# EAGLE board main-old (EAGLE 6.2)
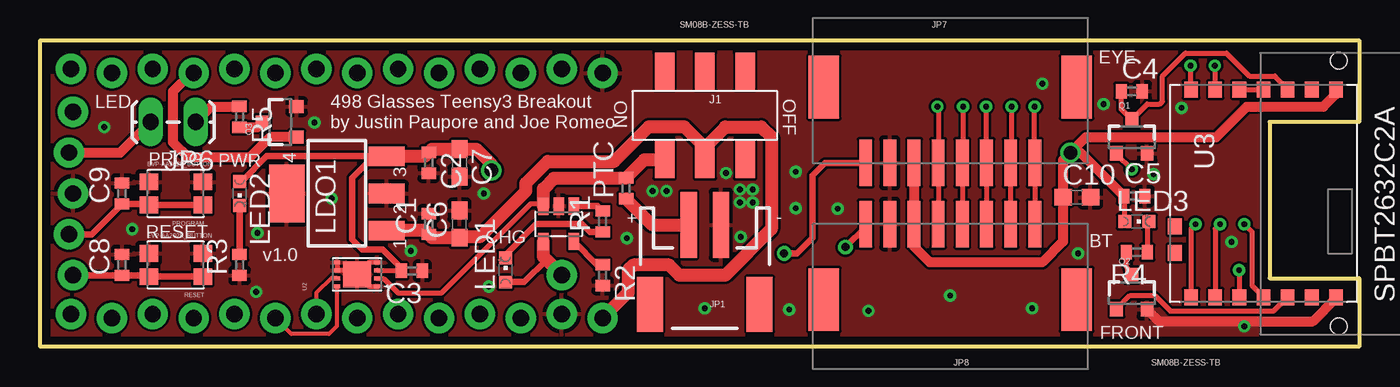
[diagram p0: board, top side]
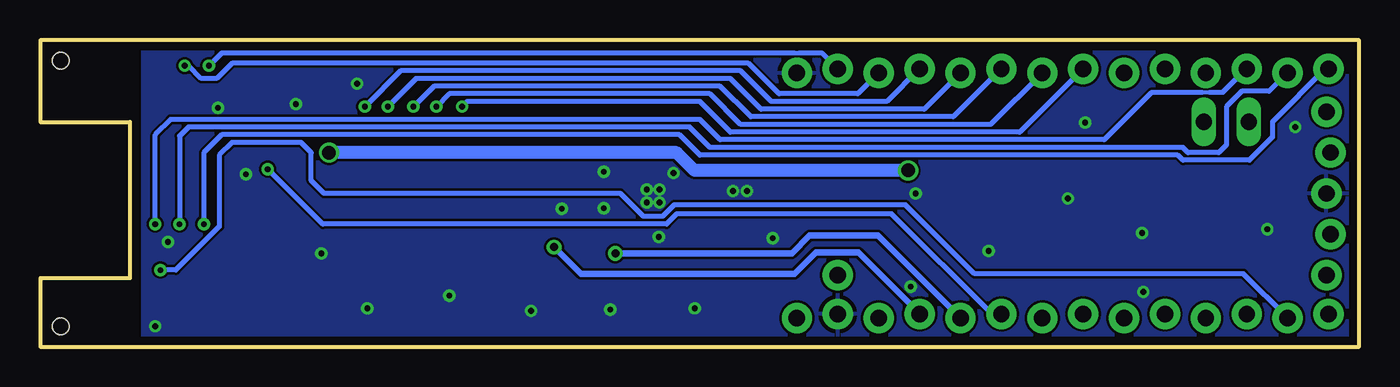
[diagram p1: board, bottom side, seen from below]

Size 81.92 x 19.05 mm. Coordinates in mm from the lower left corner, seen from the top.
Outline: 0,0 0,19.05 81.92,19.05 81.92,13.97 76.36,13.97 76.36,4.25 81.92,4.25 81.92,0 0,0
Copper layers (1*16): Top 0.0178mm / dielectric 59mil / Bottom 0.0178mm
Design rules: minimum track width 6mil, minimum drill 14mil, track to track 6mil, track to pad 6mil, pad to pad 6mil, via to via 6mil, smd to smd 6mil, copper to edge 20mil, drill to drill 16mil, minimum pad ring 8mil, minimum via ring 8mil, stop-mask expansion 3mil, vias tented up to drill 0mil, thermal gap 10mil
Holes 1 mm at 80.64,1.27 80.64,17.78

## Footprints (pad centres in the part's own frame; a part is rotated, then mirrored left to right if it is on the bottom)
C0402 = smd 0.7 x 0.9: 1 -0.65,0; 2 0.65,0
C0603 = smd 1.1 x 1: 1 -0.85,0; 2 0.85,0
JS2020_6PIN_SMT = smd 1.2 x 2.3: P1 -2.5,1.25; P2 -2.5,-4.25; P3 0,1.25; P4 0,-4.25; P5 2.5,1.25; P6 2.5,-4.25
JST-2-SMD = smd 1 x 4.1: 1 -1,-3.45; 2 1,-3.45 | smd 1.6 x 3.4: NC1 -3.4,1.5; NC2 3.4,1.5
1X14_LOCK = drill 1.016 pad 1.88: 1 0,0.127; 2 2.54,-0.127; 3 5.08,0.127; 4 7.62,-0.127; 5 10.16,0.127; 6 12.7,-0.127; 7 15.24,0.127; 8 17.78,-0.127; 9 20.32,0.127; 10 22.86,-0.127; 11 25.4,0.127; 12 27.94,-0.127; 13 30.48,0.127; 14 33.02,-0.127
1X05_LOCK = drill 1.016 pad 1.88: 1 0,0.127; 2 2.54,-0.127; 3 5.08,0.127; 4 7.62,-0.127; 5 10.16,0.127
1X01 = drill 1.016 pad 1.88: 1 0,0
1X02_LOCK_LONGPADS = drill 1.016 long: 1 -0.127,0; 2 2.667,0
SM08B_8PIN_SMD = smd 1.9 x 3.9: MOUNT1 -7.85,-4.7; MOUNT2 7.85,-4.7 | smd 0.8 x 2.9: P1 -5.25,0; P2 -3.75,0; P3 -2.25,0; P4 -0.75,0; P5 0.75,0; P6 2.25,0; P7 3.75,0; P8 5.25,0
SOT223 = smd 1.219 x 2.235: 1 -2.311,-3.099; 2 0,-3.099; 3 2.311,-3.099 | smd 3.6 x 2.2: 4 0,3.099
CHIPLED_0603 = smd 0.8 x 0.8: A 0,-0.75; C 0,0.75
EVP-AA202K_4PIN = smd 1.15 x 1.05: A -1.675,0.725; A' 1.675,0.725; B -1.675,-0.725; B' 1.675,-0.725
R0402 = smd 0.7 x 0.9: 1 -0.65,0; 2 0.65,0
SOT23-3 = smd 0.8 x 0.9: 1 -0.95,-1; 2 0.95,-1; 3 0,1.1
SOT23-5 = smd 1.06 x 0.65: P1 -0.35,0.95; P2 -0.35,0; P3 -0.35,-0.95; P4 1.85,-0.95; P5 1.85,0.95
TDFN_8PIN = smd 1.63 x 1.75: EP 1,0 | smd 0.25 x 0.4: P1 0.25,-1.25; P2 0.75,-1.25; P3 1.25,-1.25; P4 1.75,-1.25; P5 1.75,1.25; P6 1.25,1.25; P7 0.75,1.25; P8 0.25,1.25
SPBT2632C2A_16PIN_SMD = smd 1 x 0.85: P1 -6.45,-1.3; P2 -6.45,-2.8; P3 -6.45,-4.3; P4 -6.45,-5.8; P5 -6.45,-7.3; P6 -6.45,-8.8; P7 -6.45,-10.3; P8 6.45,-10.3; P9 6.45,-8.8; P10 6.45,-7.3; P11 6.45,-5.8; P12 6.45,-4.3; P13 6.45,-2.8; P14 6.45,-1.3; P15 -2.05,-0.3; P16 -3.7,-0.3

## Placement (x,y rotation side)
C1  1uF  [C0402]  24.13,7.62 90 top
C2  1uF  [C0402]  24.13,11.43 270 top
C3  1uF  [C0402]  23.08,4.71 180 top
C4  0.1uF  [C0402]  67.79,15.88 0 top
C5  1uF  [C0402]  67.94,9.37 0 top
C6  10uF  [C0603]  26.04,7.62 90 top
C7  10uF  [C0603]  26.04,11.43 270 top
C8  0.1uF  [C0402]  5.08,5.08 90 top
C9  0.1uF  [C0402]  5.08,9.53 90 top
C10  10uF  [C0603]  64.37,9.29 0 top
J1  JS202011SCQN  [JS2020_6PIN_SMT]  41.27,15.88 0 top
JP1  [JST-2-SMD]  41.27,4.13 180 top
JP2  M14LOCK  [1X14_LOCK]  1.91,17.14 0 top
JP3  M14LOCK  [1X14_LOCK]  1.91,1.91 0 top
JP4  [1X05_LOCK]  1.91,14.61 270 top
JP5  M01PTH  [1X01]  32.38,4.45 0 top
JP6  LED  [1X02_LOCK_LONGPADS]  9.53,13.97 180 top
JP7  SM08B-ZESS-TB  [SM08B_8PIN_SMD]  56.52,11.43 180 top
JP8  SM08B-ZESS-TB  [SM08B_8PIN_SMD]  56.52,7.62 0 top
LDO1  TC1262  [SOT223]  18.41,9.53 90 top
LED1  RED  [CHIPLED_0603]  28.89,4.76 0 top
LED2  GREEN  [CHIPLED_0603]  12.38,9.53 180 top
LED3  BLUE  [CHIPLED_0603]  68.1,7.78 270 top
PROGRAM  EVP-AA202K_BUTTON  [EVP-AA202K_4PIN]  8.41,9.53 180 top
PTC  500mA  [R0402]  36.39,9.84 90 top
Q1  2N7002  [SOT23-3]  67.79,13.02 0 top
Q2  2N7002  [SOT23-3]  67.79,3.33 0 top
Q3  2N7002  [SOT23-3]  14.92,13.97 90 top
R1  150  [R0402]  34.92,7.78 90 top
R2  4.7K  [R0402]  34.92,4.45 270 top
R3  56  [R0402]  12.38,5.08 90 top
R4  56  [R0402]  68.1,5.87 180 top
R5  DNI  [R0402]  12.38,14.29 270 top
RESET  EVP-AA202K_BUTTON  [EVP-AA202K_4PIN]  8.41,5.08 180 top
U1  MCP73831-SOT5  [SOT23-5]  32.19,8.38 270 top
U2  MAX17040-TDFN  [TDFN_8PIN]  19.68,3.49 90 top
U3  SPBT2632C2A  [SPBT2632C2A_16PIN_SMD]  70.17,9.53 90 top

## Library data of the parts
C1-C10 PTC R1-R5 = resistor
J1 JP7 JP8 LDO1 PROGRAM RESET U1-U3 = glasses
JP1-JP6 Q1-Q3 = SparkFun
LED1-LED3 = led

## Nets
+3V3: JP4.2 JP6.2
BT_RESET: JP3.9 Q1.1
GND: C1.2 C2.2 C3.1 C4.2 C5.2 C6.2 C7.2 C8.2 C9.2 C10.2 JP1.1 JP2.14 JP3.13 JP4.3 JP7.P7 JP8.P2 LDO1.2 LDO1.4 PROGRAM.B PROGRAM.B' Q1.2 Q2.2 Q3.2 R2.2 R3.1 RESET.B RESET.B' U1.P2 U2.EP U2.P1 U2.P4 U2.P5 U2.P6 U3.P7
I2C_SCL: JP3.7 U2.P7
I2C_SDA: JP3.6 U2.P8
INCP: JP2.10 JP7.P2 JP8.P7
INCV: JP2.8 JP7.P4 JP8.P5
INPHI: JP2.7 JP7.P5 JP8.P4
IR_LED: JP2.4 Q3.1
N$1: LED1.C R1.1
N$2: R1.2 U1.P1
N$3: R2.1 U1.P5
N$4: JP1.2 PTC.1
N$5: LED2.C R3.2
N$6: U3.P11 U3.P12
N$7: C4.1 Q1.3 U3.P10
N$8: Q2.1 U3.P5
N$9: LED3.C R4.1
N$10: Q2.3 R4.2
N$11: JP6.1 R5.1
N$12: Q3.3 R5.2
PIXEL_EYE: JP3.10 JP7.P8
PIXEL_FRONT: JP3.11 JP8.P1
RESP: JP2.11 JP7.P1 JP8.P8
RESV: JP2.9 JP7.P3 JP8.P6
SPI_CS: JP2.3 U3.P4
SPI_MISO: JP2.1 U3.P1
SPI_MOSI: JP2.2 U3.P2
SPI_SCK: JP3.2 U3.P3
TS_GP7: JP2.6
TS_GP8: JP2.5
TS_GP13: JP3.1
TS_GP15: JP3.3
TS_GP16: JP3.4
TS_GP17: JP3.5
TS_GP20: JP3.8
TS_PROG: C9.1 JP4.4 PROGRAM.A PROGRAM.A'
TS_RESET: C8.1 JP4.5 RESET.A RESET.A'
TS_VBAT: JP4.1
UART1_RXD: JP2.13 U3.P14
UART1_TXD: JP2.12 U3.P13
VBAT: J1.P2 PTC.2 U1.P3 U2.P2
VCC: JP3.12
VCCIO: C2.1 C3.2 C5.1 C7.1 C10.1 JP7.P6 JP8.P3 LDO1.3 LED2.A LED3.A U2.P3 U3.P8
VIN: C1.1 C6.1 J1.P4 JP3.14 LDO1.1
VUSB: JP5.1 LED1.A U1.P4

## Tracks (layer width: path | path; a pad name or v marks a point on that pad's centre or on a via)
+3V3
  Top 0.61: JP4.2 4.95,12.06 JP6.2
BT_RESET  (via drill 0.36)
  Top 0.305: Q1.1 66.84,11.98 v67.79,11.03
  Bottom 0.305: JP3.9 22.83,2.03 29.05,8.26 42.39,8.26 43.02,7.62 64.37,7.62 v67.79,11.03
GND  (via drill 0.36)
  Top 0.305: U2.EP 19.68,4.74 U2.P6 U2.P5 | U2.P4 20.43,5.24 U2.EP | U2.EP 20.43,3.74 U2.P1
  Top 0.406: 80.47,3 U3.P7
  Top 0.61: Q2.2 69.48,1.59 79.06,1.59 80.47,3
  other vias: 43.5,6.83 23.02,5.95 27.54,9.53 36.43,6.75 56.52,3.17 61.59,2.38 51.44,2.22 13.49,7.06 18.1,9.21 3.97,13.65 5.71,7.3 38.89,9.68 70.88,14.84 13.41,3.41 27.86,3.73 46.91,10.87 46.91,8.61 46.51,2.3 41.27,2.38 62.23,16.35 66.04,15.08 43.46,9.76 44.25,9.76 43.46,8.97 44.25,8.97 42.58,10.79 17.03,13.93 64.45,5.79 74.77,1.27 69.14,10.72 73.98,6.51 38.02,9.68 49.53,8.57
  pour Bottom: 0,0 0,19.05 75.56,19.05 75.56,0
  pour Top (rank 6): 0,0 0,19.05 75.56,19.05 75.56,0
I2C_SCL
  Top 0.254: U2.P7 18.39,4.29 18.1,4.29 17.14,3.33 JP3.7
I2C_SDA
  Top 0.254: U2.P8 18.41,3.72 18.41,1.27 17.94,0.79 15.59,0.79 JP3.6
INCP  (via drill 0.36)
  Top 0.305: JP8.P7 JP7.P2 60.33,11.43 v60.33,14.92
  Bottom 0.305: JP2.10 27.02,14.76 37.15,14.76 39.05,16.67 58.58,16.67 v60.33,14.92
INCV  (via drill 0.36)
  Top 0.305: JP8.P5 JP7.P4 57.31,11.47 v57.31,14.92
  Bottom 0.305: JP2.8 22.89,13.81 38.42,13.81 40.32,15.72 56.52,15.72 v57.31,14.92
INPHI  (via drill 0.36)
  Top 0.305: JP8.P4 JP7.P5 55.77,14.88 v55.72,14.92
  Bottom 0.305: JP2.7 21.08,13.34 39.05,13.34 40.96,15.24 55.4,15.24 v55.72,14.92
IR_LED
  Top 0.61: Q3.1 14.29,13.02 13.02,11.75 9.21,11.75 8.26,12.7 8.26,15.88 9.4,17.02 JP2.4
N$1
  Top 0.406: LED1.C 28.89,5.71 30.8,7.62 33.66,7.62 34.15,7.13 R1.1
N$2
  Top 0.406: R1.2 34.62,8.73 U1.P1
N$3
  Top 0.406: U1.P5 34.58,5.09 R2.1
N$4
  Top 0.813: PTC.1 38,7.58 JP1.2
N$5
  Top 0.406: LED2.C R3.2
N$6
  Top 0.305: U3.P12 U3.P11
N$7
  Top 0.305: C4.1 67.14,14.77 Q1.3 68.75,15.08 69.53,15.08 69.69,15.24 69.69,16.83 71.12,18.26 73.66,18.26 75.09,16.83 76.68,16.83 77.47,16.04 U3.P10
N$8
  Top 0.305: Q2.1 67.68,3.17 69.22,3.17 70.17,2.22 76.6,2.22 77.45,3.08 U3.P5
N$9
  Top 0.305: LED3.C 68.75,7.68 R4.1
N$10
  Top 0.305: Q2.3 67.79,4.6 67.45,4.94 R4.2
N$11
  Top 0.61: JP6.1 10.62,14.94 R5.1
N$12
  Top 0.61: R5.2 13.49,13.64 Q3.3
PIXEL_EYE  (via drill 0.51)
  Top 0.406: JP7.P8 48.74,11.43 47.94,10.64 47.94,6.75 46.99,5.79 v46.2,5.79
  Bottom 0.406: JP3.10 29.89,6.91 34.13,6.91 35.24,5.79 v46.2,5.79
PIXEL_FRONT  (via drill 0.51)
  Top 0.406: JP8.P1 51.27,7.45 v50.01,6.19
  Bottom 0.406: v50.01,6.19 48.34,4.52 35.08,4.52 33.73,5.87 31.11,5.87 27.3,2.06 JP3.11
RESP  (via drill 0.36)
  Top 0.305: JP8.P8 JP7.P1 61.75,11.44 v61.75,14.92
  Bottom 0.305: JP2.11 29.34,15.24 36.51,15.24 38.42,17.14 59.53,17.14 v61.75,14.92
RESV  (via drill 0.36)
  Top 0.305: JP8.P6 JP7.P3 58.74,11.43 v58.74,14.92
  Bottom 0.305: JP2.9 25.21,14.29 37.78,14.29 39.69,16.19 57.47,16.19 v58.74,14.92
SPI_CS  (via drill 0.36)
  Top 0.305: 75.97,3.25 U3.P4 75.25,3.81 75.25,7.14 v74.77,7.62
  Bottom 0.254: 9.29,15.8 9.76,15.8
  Bottom 0.305: v74.77,7.62 74.77,13.18 73.82,14.13 40.96,14.13 39.69,12.86 15.84,12.86 12.91,15.8 9.76,15.8 | JP2.3 7.02,17.27 8.49,15.8 9.29,15.8
SPI_MISO  (via drill 0.36)
  Top 0.305: v71.75,7.62 71.47,7.33 U3.P1
  Bottom 0.305: JP2.1 2.1,17.27 5.4,13.97 5.4,13.02 6.83,11.59 10.95,11.59 11.27,11.91 40.96,11.91 42.23,13.18 70.64,13.18 71.75,12.06 v71.75,7.62
SPI_MOSI  (via drill 0.36)
  Top 0.305: 73.03,3.08 U3.P2 72.97,7.32 v73.26,7.62
  Bottom 0.305: JP2.2 5.59,15.88 7.3,15.88 8.26,14.92 8.26,12.54 8.73,12.06 10.64,12.06 10.95,12.38 40.32,12.38 41.59,13.65 72.71,13.65 73.26,13.1 v73.26,7.62
SPI_SCK  (via drill 0.36)
  Top 0.305: v74.45,4.76 74.45,3.09 U3.P3
  Bottom 0.305: JP3.2 7.19,4.52 23.89,4.52 28.18,8.81 42.55,8.81 43.26,8.1 44.45,8.1 45.88,9.53 64.29,9.53 65.09,10.32 65.09,12.06 65.72,12.7 70.01,12.7 70.8,11.91 70.8,7.46 73.5,4.76 v74.45,4.76
TS_PROG
  Top 0.406: JP4.4 3.19,6.99 C9.1 6.66,8.88 PROGRAM.A' PROGRAM.A
TS_RESET
  Top 0.406: JP4.5 5.07,4.45 C8.1 6.66,4.43 RESET.A' RESET.A
UART1_RXD  (via drill 0.36)
  Top 0.254: 71.44,15.97 U3.P14
  Top 0.305: v71.44,17.46 71.44,15.97
  Bottom 0.279: 34.77,18.26 35.08,18.26
  Bottom 0.305: JP2.13 33.37,18.26 34.77,18.26 | 35.08,18.26 70.64,18.26 v71.44,17.46
UART1_TXD  (via drill 0.36)
  Top 0.305: v72.95,17.46 72.95,16 U3.P13
  Bottom 0.305: JP2.12 31.15,15.72 36.04,15.72 37.94,17.62 70.01,17.62 70.96,16.67 71.91,16.67 72.71,17.46 v72.95,17.46
VBAT
  Top 0.305: U2.P2 21.32,4.24 22.23,3.33 24.92,3.33 30.48,8.89 31.09,8.89 U1.P3
  Top 0.813: U1.P3 31.24,9.81 31.91,10.48 36.37,10.48 PTC.2 37.52,11.62 J1.P2
VCCIO  (via drill 0.84)
  Top 0.305: U2.P3 22.41,4.74 C3.2 | LED3.A 67.35,9.31 C5.1
  Top 0.406: LED2.A 12.5,10.28 14.06,11.84 LDO1.3 20.73,11.84 19.37,10.48 19.37,6.67 20,6.03 21.27,6.03 22.43,4.87 C3.2 | 80.47,15.7 U3.P8
  Top 0.61: 80.47,15.7 79.69,14.92 74.93,14.92 73.03,13.02 64.93,13.02 v63.98,12.06 | JP7.P6 JP8.P3 54.27,6.22 55.24,5.24 62.23,5.24 63.52,6.53 C10.1 63.52,11.61 v63.98,12.06 | v63.98,12.06 64.6,12.06 C5.1
  Top 0.813: LDO1.3 23.89,11.84 C2.1 24.33,12.28 C7.1 27.09,12.28 28.02,11.35 v28.02,10.95
  Bottom 0.813: v28.02,10.95 41.27,10.95 42.39,12.06 v63.98,12.06
VIN
  Top 0.813: J1.P4 41.27,12.38 | 41.27,12.38 42.55,13.65 44.77,13.65 45.4,13.02 45.4,7.3 42.55,4.45 39.69,4.45 39.05,5.08 36.83,5.08 36.51,4.76 36.51,3.37 JP3.14 | 41.27,12.38 40.01,13.65 37.78,13.65 35.64,11.51 31.51,11.51 30.16,10.16 30.16,9.68 27.3,6.83 26.09,6.83 C6.1 24.33,6.77 C1.1 23.89,7.21 LDO1.1
VUSB
  Top 0.406: LED1.A 30.05,4.01 31.43,5.4
  Top 0.813: JP5.1 31.43,5.4 31.24,5.58 U1.P4

## Text on the board
tPlace: EYE | LED | 498 Glasses Teensy3 Breakout | by Justin Paupore and Joe Romeo | ON | OFF | PROG | PWR | + | - | RESET | CHG | BT | v1.0 | FRONT